# Altium PCB DAC_Board_PCB.PcbDoc
Units mm, origin at the board's own origin, x right, y up, seen from the top; angles counter-clockwise.
Board outline 60 x 24.75 mm, 2 copper layers (Top Layer, Bottom Layer); 38 components, 25 nets, 130 pads, 65 vias.
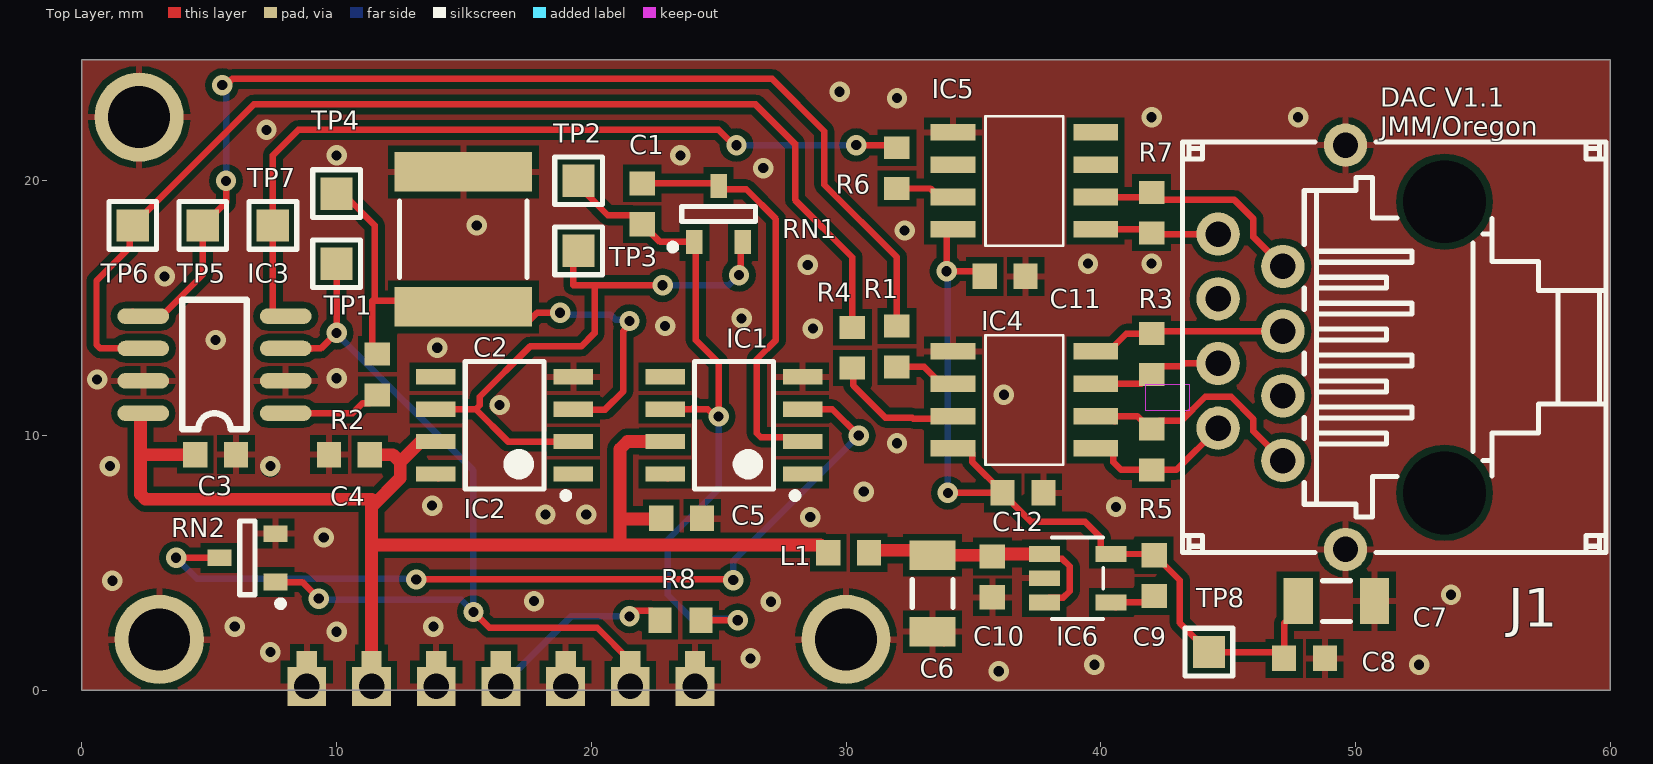
[diagram p0: Top Layer view]
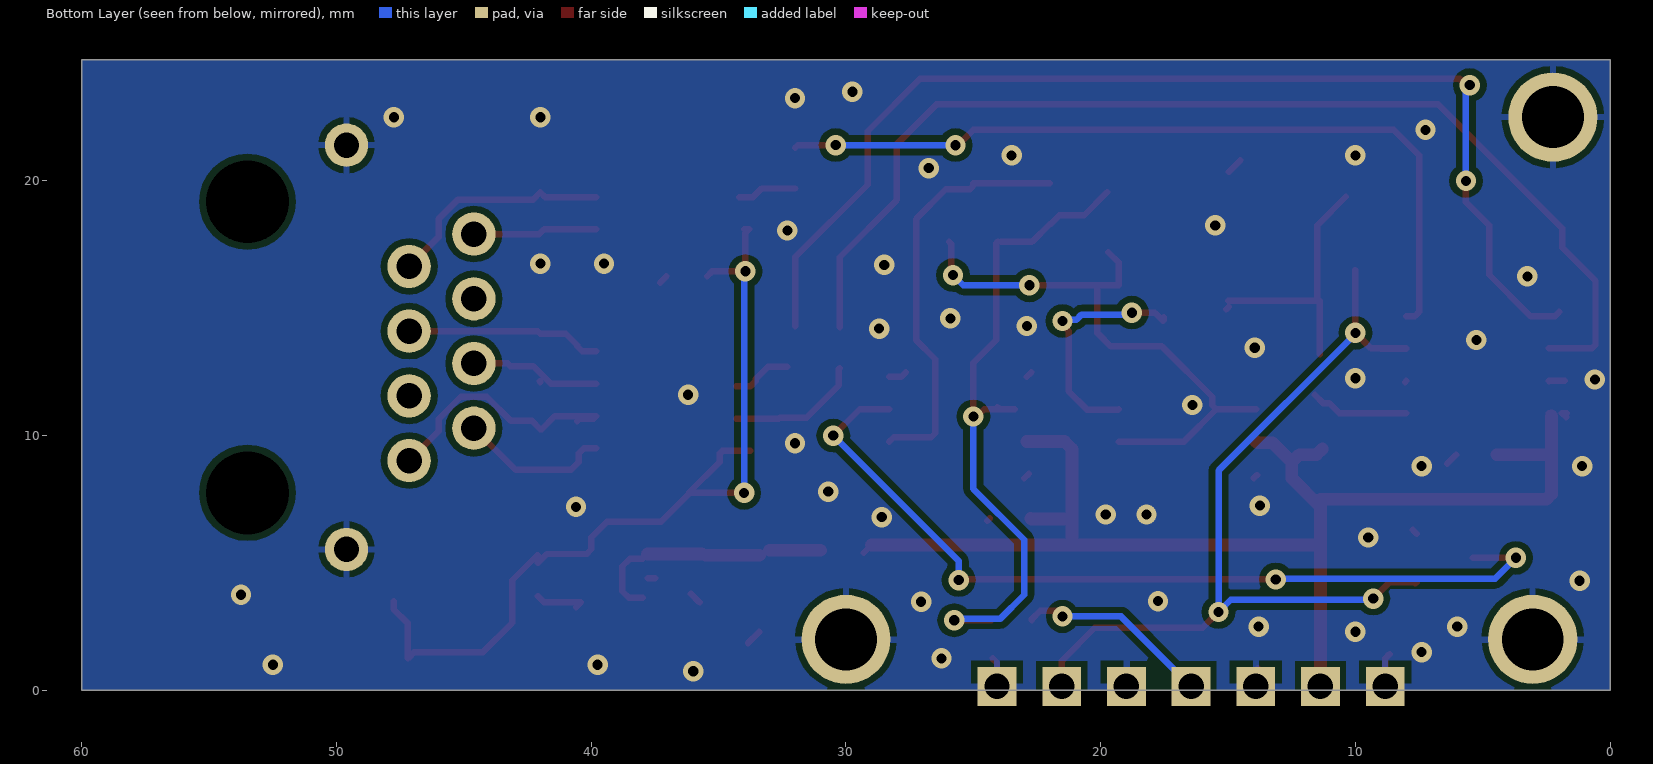
[diagram p1: Bottom Layer view, seen from below]

## Layer stack, top to bottom
Top Solder: solder mask 0.0102, Solder Resist, Dk 3.5
Top Layer: signal copper 0.0356
Dielectric 1: dielectric 0.32, FR-4, Dk 4.8
Bottom Layer: signal copper 0.0356
Bottom Solder: solder mask 0.0102, Solder Resist, Dk 3.5

## Board outline
0,0 60,0 60,24.75 0,24.75

## Design rules (kind name [scope] priority, off if disabled: settings)
Clearance [All] p1: gap=0.254 ignorepadtopadclearanceinfootprint=TRUE except(0: Arc-Hole Track-Hole SMDPad-Hole THPad-Hole Via-Hole Fill-Hole Poly-Hole Region-Hole Text-Hole)
HoleSize [All] p1: absolutevalues=TRUE maxlimit=5 minlimit=0.025 maxpercent=80.000 minpercent=20.000
MinimumSolderMaskSliver [All] p1: minsoldermaskwidth=0.1
PolygonConnect [All] p1: connectstyle=Relief reliefconductorwidth=0.254 reliefentries=4 polygonreliefangle="90 Angle" airgapwidth=0.254
RoutingVias [All] p1: holewidth=0.711 width=1.27 viastyle="Through Hole" minholewidth=0.711 minwidth=1.27 maxholewidth=0.711 maxwidth=1.27
SilkToSilkClearance [All] p1: silktosilkclearance=0.1
SilkToSolderMaskClearance [IsPad] p1: minsilkscreentomaskgap=0.1 clearancetoexposedcopper=TRUE
SolderMaskExpansion [All] p1: expansion=0.102
Width [All] p1: maxlimit=0.6 minlimit=0.254 preferedwidth=0.254 minimp=50.000000 maximp=50.000000 favimp=50.000000
26 further rules are at their usual default settings.

## Components (designator, comment, footprint, x,y, rotation, side; value= is the part's Value field where it differs from the comment)
C1 "8.2pF" CAPC1608X87N 22,19.1 r270 top
C2 "10 uF" CAPC5750X279N 14.975,17.7 r270 top
C3 "100nF" CAPC1608X87N 5.25,9.25 r180 top
C4 "100nF" CAPC1608X87N 10.5,9.25 r0 top
C5 "100nF" CAPC1608X87N 23.55,6.75 r180 top
C6 "10uF" CAPC3216X180N 33.4,3.8 r90 top
C7 "10uF" CAPC3216X180N 49.25,3.5 r180 top
C8 "100nF" CAPC1608X87N 48,1.25 r180 top
C9 "10nF" CAPC1608X87N 42.1,4.5 r90 top
C10 "100nF" CAPC1608X87N 35.75,4.45 r90 top
C11 "100nF" CAPC1608X87N 36.25,16.25 r180 top
C12 "100nF" CAPC1608X87N 36.95,7.75 r180 top
IC1 "LT1677" SOIC127P600X175-8N 25.6,10.4 r180 top
IC2 "LT1677" SOIC127P600X175-8N 16.6,10.4 r180 top
IC3 "AD5541" AD5541 5.1,12.3 r180 top
IC4 "FIN1028MX" FIN1028MX 37,11.4 r0 top
IC5 "FIN1028MX" FIN1028MX 37,20 r0 top
IC6 "LT1761ES5-3.3#TRPBF" LDO 39.1,4.4 r0 top
J1 "RJ45" TYCO_6368150-1 45.88,13.465 r90 top
L1 "120R@100MHz" INDC1608X95N 30.1,5.4 r180 top
R1 "100" RESC1608X55N 32,13.5 r270 top
R2 "0" RESC1608X55N 11.6,12.4 r90 top
R3 "100" RESC1608X55N 42,13.2 r90 top
R4 "100" RESC1608X55N 30.25,13.45 r270 top
R5 "100" RESC1608X55N 42,9.45 r90 top
R6 "100" RESC1608X55N 32,20.5 r270 top
R7 "100" RESC1608X55N 42,18.75 r90 top
R8 "1k" RESC1608X55N 23.5,2.75 r180 top
RN1 "=Value" SOT95P230X112-3N 25,18.7 r90 top
RN2 "=Value" SOT95P230X112-3N 6.5,5.2 r180 top
TP1 "Test Point" TPS127 10,16.75 r0 top
TP2 "Test Point" TPS127 19.5,20 r0 top
TP3 "Test Point" TPS127 19.5,17.25 r0 top
TP4 "Test Point" TPS127 10,19.5 r0 top
TP5 "Test Point" TPS127 4.75,18.25 r0 top
TP6 "Test Point" TPS127 2,18.25 r0 top
TP7 "Test Point" TPS127 7.5,18.25 r0 top
TP8 "Test Point" TPS127 44.25,1.5 r0 top

## Footprints (in the part's own frame and the unit in brackets; to place one, negate y for a bottom-side part, rotate by r counter-clockwise, add the part's x,y. Pads: shape width x height; smd on the part's side, far side on the other; paste and mask are expansions set on the pad)
AD5541 [mil] "AD5541LRZ DAC"
  oval 80x24 smd: 1(-114.17,55.95) 2(-114.17,5.95) 3(-114.17,-44.05) 4(-114.17,-94.05) 5(105.83,-94.05) 6(105.83,-44.05) 7(105.83,5.95) 8(105.83,55.95)
  silkscreen extent -54,-119 46,81, body extent -128,-117 116,80, height 69
CAPC1608X87N [mm] "Chip Capacitor, Body 1.6x0.8mm IPC Medium Density"
  rect 0.95x1 smd: 1(-0.8,0) 2(0.8,0)
  body extent -0.87,-0.47 0.88,0.48, height 0.87
CAPC3216X180N [mm] "Chip Capacitor, Body 3.2x1.6mm, IPC Medium Density"
  rect 1.15x1.8 smd: 1(-1.5,0) 2(1.5,0)
  silkscreen extent -0.55,-0.8 0.55,0.8, body extent -1.7,-0.9 1.7,0.9, height 1.8
CAPC5750X279N [mm] "Chip Capacitor, 2-Leads, Body 5.7x5.0mm, IPC Medium Density"
  rect 1.55x5.4 smd: 1(-2.65,0) 2(2.65,0)
  silkscreen extent -1.5,-2.5 1.5,2.5, body extent -3.05,-2.7 3.05,2.7, height 2.79
FIN1028MX [mm] "LDVS to TTL"
  rect 1.75x0.65 smd: 1(2.8,-1.905) 2(2.8,-0.635) 3(2.8,0.635) 4(2.8,1.905) 5(-2.8,-1.905) 6(-2.8,-0.635) 7(-2.8,0.635) 8(-2.8,1.905)
  silkscreen extent -1.52,-2.54 1.52,2.54
INDC1608X95N [mm] "Chip Inductor, 2-Leads, EIA 0603, Metric 1608, Body 1.6x0.8mm, IPC Medium Density"
  rect 0.95x1 smd: 1(-0.8,0) 2(0.8,0)
  body extent -0.87,-0.47 0.88,0.48, height 0.95
LDO [mm] "3.3 V LDO"
  rect 1.22x0.62 smd: 1(-1.31,0.95) 2(-1.31,0) 3(-1.31,-0.95) 4(1.31,-0.95) 5(1.31,0.95)
  silkscreen extent -1.01,-1.6 1,1.6
RESC1608X55N [mm] "Chip Resistor, EIA 0603, Metric 1608, Body 1.6x0.8mm, IPC Medium Density"
  rect 0.9x1 smd: 1(-0.8,0) 2(0.8,0)
  body extent -0.87,-0.47 0.88,0.48, height 0.55
SOIC127P600X175-8N [mm] "SOIC 8, Pitch 1.27mm - Body 4x5mm, IPC Medium Density"
  rect 1.55x0.6 smd: 1(-2.7,1.905) 2(-2.7,0.635) 3(-2.7,-0.635) 4(-2.7,-1.905) 5(2.7,-1.905) 6(2.7,-0.635) 7(2.7,0.635) 8(2.7,1.905)
  silkscreen extent -2.53,-2.5 1.55,2.88, body extent -3.1,-2.5 3.1,2.5, height 1.75
SOT95P230X112-3N [mm] "SOT23 3-Leads, Pitch 0.95mm - Body 1.3x2.86mm, IPC Medium Density"
  rect 0.95x0.65 smd: 1(-1.1,0.95) 2(-1.1,-0.95) 3(1.1,0)
  silkscreen extent -1.42,-1.45 0.3,1.92, body extent -1.25,-1.5 1.25,1.5, height 1.1
TPS127 [mm] "1.27 x  1.27mm SMD Test Point Area"
  rect 1.27x1.27 smd paste-1.27: 1(0,0)
  silkscreen extent -0.94,-0.94 0.94,0.94
TYCO_6368150-1 [mm] "1 Port RJ45, Straight"
  round 1.7 hole 1: 1(-4.445,-1.27) 2(-3.175,1.27) 3(-1.905,-1.27) 4(-0.635,1.27) 5(0.635,-1.27) 6(1.905,1.27) 7(3.175,-1.27) 8(4.445,1.27) SHIELD(-7.935,-3.73) SHIELD(7.935,-3.73)
  round 0.5 hole 3.25 unplated mask+1.375: M1(5.715,-7.62) M2(-5.715,-7.62)
  silkscreen extent -8.06,-13.96 8.06,2.67, body extent -8.06,-13.96 8.06,2.67, height 16.82

## Part data
C1: library part CC0603_8.2PF_50V_0.5PF_NP0, "Non-polarised capacitor"
C2: library part CAPF2220_10uF_25V_20%
C3 C4 C5 C8 C10 C11 C12: library part CC0603_100NF_50V_10%_X7R, "Non-polarised capacitor"
C6 C7: library part CC1206_10UF_25V_10%_X7R, "Non-polarised capacitor"
C9: library part CC0603_10NF_50V_10%_X7R, "Non-polarised capacitor"
IC1 IC2: "0-5 V Rail to Rail op amp"
IC3: "16 bit serial DAC"
IC4 IC5: "LVDS to TTL"
IC6: "3.3 V LDO"
J1: library part TYCO_6368150-1, "Connector RJ45 + Shield"
L1: library part IND0603_MURATA_BLM18PG121SN1D, "Inductor"
R1 R3 R4 R5 R6 R7: library part R0603_100R_1%_0.1W_100PPM, "Resistor - 1%"
R2: library part R0603_0R_JUMPER, "Resistor"
R8: library part R0603_1K0_0.1%_0.063W_10PPM, "Resistor - 0.1%"
RN1: library part RN_1k_10k_VISHAY_MPMT10011002AT1, "Resistor Network Divider - 0.1%"
RN2: library part RN_1k_20k_VISHAY_MPMT10012002AT1, "Resistor Network Divider - 0.1%"
TP1 TP2 TP3 TP4 TP5 TP6 TP7 TP8: library part SMD_PAD_1.27X1.27MM

## Free pads (board coordinates)
  round 3.5 hole 2.43: 1(2.25,22.5) 1(3.04,2) 1(30,2)
  rect 0.8x1.55 smd: 6(8.832,0.775) 7(11.372,0.775) 8(13.912,0.775) 9(16.452,0.775) 10(18.992,0.775) 11(21.532,0.775) 12(24.072,0.775)
  rect 1.524x1.524 hole 1: 13(8.832,0.15) 13(11.372,0.15) 13(13.912,0.15) 13(16.452,0.15) 13(18.992,0.15) 13(21.532,0.15) 13(24.072,0.15)

## Via types
v1: diameter 0.8, hole 0.4, Top Layer to Bottom Layer, 65 vias

## Nets (pads, with @x,y where several pads share a name; then routed paths per layer and width w, separated by ;. In a path a pad name is that pad's centre, name@x,y a point inside that pad or via, vN(x,y) a via of type N, cw(c..) or ccw(c..) an arc to the next point about the centre after c; other vN are vias at no path point)
GND: C2.1 C3.1 C4.1 C5.1 C6.1 C7.1 C8.1 C10.1 C11.1 C12.1 IC1.4 IC2.4 IC3.2 IC3.7 IC4.8 IC5.8 IC6.2 J1.SHIELD pad.1 pad.6 pad.8 pad.10 pad.12 pad.13@8.832,0.15 pad.13@13.912,0.15 pad.13@18.992,0.15 pad.13@24.072,0.15 RN2.2 | length 6.4
  Top Layer w0.254: IC3.7@1.776,12.149 IC3.7 IC3.7@2.388,12.124 ; C3.1@6.15,9.15 C3.1 6.05,9.247 6.149,9.149 C3.1@6.398,8.899 ; v1@7.4,8.74 v1(7.4,8.8) ; RN2.2 RN2.2@7.746,6.296 ; IC3.2 IC3.2@8.049,12.099 ; pad.6@8.659,1.423 8.832,1.25 pad.6 ; pad.8@13.831,0.856 pad.8 ; C2.1@14.525,20.8 C2.1 ; pad.10 pad.10@18.996,0.779 ; pad.12 24.072,1.077 pad.12@24.245,1.25 ; C5.1 C5.1@24.45,6.65 ; IC1.4@27.652,12.478 27.825,12.305 IC1.4 ; C6.1 C6.1@33.848,1.852 ; C10.1@35.75,3.45 C10.1@36.098,3.798 ; C11.1 C11.1@37.3,16 ; IC6.2@37.49,4.4 IC6.2 ; J1.SHIELD@49.61,21.4 J1.SHIELD@49.68,21.47
  other v1: 36,0.75 39.75,1 52.5,1 26.25,1.25 7.4,1.5 10,2.3 6,2.5 13.8,2.5 27.05,3.475 17.75,3.5 53.75,3.75 1.2,4.3 9.5,6 28.6,6.8 18.2,6.9 19.8,6.9 40.6,7.2 13.75,7.25 30.7,7.8 1.1,8.8 32,9.7 16.4,11.2 36.2,11.6 0.6,12.2 10,12.25 13.95,13.45 5.25,13.75 28.7,14.2 22.9,14.3 25.9,14.6 3.25,16.25 28.5,16.7 39.5,16.75 42,16.75 32.302,18.052 15.5,18.25 26.75,20.5 10,21 23.5,21 7.25,22 42,22.5 47.75,22.5 32,23.25 29.75,23.5
NetC1_1: C1.1 IC1.2 RN1.3 | length 16.5
  Top Layer w0.254: C1.1 25,19.9 RN1.3 25.13,19.67 26.08,19.67 27.25,18.5 27.25,13.75 26.5,13 26.5,10.087 26.649,9.938 28.127,9.938 IC1.2
NetC1_2: C1.2 IC1.6 R8.1 RN1.1 TP2.1 | length 26.5
  Top Layer w0.254: TP2.1@19.75,19.55 20.646,18.654 21.621,18.654 21.975,18.3 C1.2 22.7,17.6 RN1.1@23.896,17.6 ; IC1.6@23.375,11.035 23.971,11.035 ; RN1.1 24.101,17.549 24.101,13.75 25,12.851 v1(25,10.75) 24.852,10.75 24.567,11.035 23.971,11.035 ; 24.056,11.12 23.971,11.035 ; R8.1 v1(25.75,2.75)
  Bottom Layer w0.254: v1(25,10.75) 25,7.905 23,5.905 23,3.75 23.95,2.8 25.7,2.8 v1(25.75,2.75)
NetC9_1: C9.1 IC6.4 | length 2.1
  Top Layer w0.254: IC6.4@40.593,3.267 IC6.4 41.85,3.45 C9.1
NetIC1_3: IC1.3 RN2.3 | length 34.3
  Top Layer w0.254: v1(3.7,5.2) RN2.3 ; v1(13.125,4.35) 25.55,4.35 v1(25.575,4.325) ; IC1.3 29.465,11.035 v1(30.5,10)
  Bottom Layer w0.254: v1(3.7,5.2) 4.519,4.381 13.094,4.381 v1(13.125,4.35) ; v1(25.575,4.325) 25.575,5.075 v1(30.5,10)
NetIC3_1: IC3.1 R2.1 | length 3.9
  Top Layer w0.254: IC3.1 10.629,10.879 11.027,11.277 11.277,11.277 R2.1
NetIC4_1: IC4.1 J1.2 R5.1 | length 6
  Top Layer w0.254: IC4.1 40.297,9.495 40.495,9.297 40.495,8.959 40.804,8.65 42.97,8.65 J1.2
NetIC4_2: IC4.2 J1.1 R5.2 | length 10.1
  Top Layer w0.254: IC4.2 41.435,10.765 41.95,10.25 R5.2 42.323,10.573 43.152,10.573 44.1,11.521 45.12,11.521 45.997,10.644 45.997,10.173 J1.1 ; IC4.2@39.9,10.665 40.45,10.665 IC4.2@40.548,10.567
NetIC4_3: IC4.3 J1.4 R3.1 | length 5.2
  Top Layer w0.254: IC4.3 41.585,12.035 42.273,12.723 43.173,12.723 43.28,12.83 J1.4 ; R3.1@42,12.1 R3.1@42.03,12.13
NetIC4_4: IC4.4 J1.5 R3.2 | length 7.7
  Top Layer w0.254: IC4.4 40.35,13.305 40.548,13.503 40.548,13.548 41,14 R3.2 42.1,14.1 J1.5
NetIC4_6: IC4.6 R4.2 | length 5.3
  Top Layer w0.254: R4.2 30.282,12.618 30.282,11.968 31.55,10.7 32.6,10.7 32.635,10.665 IC4.6@34.3,10.665
NetIC4_7: IC4.7 R1.2 | length 2.4
  Top Layer w0.254: R1.2@32.3,12.7 33.066,12.7 33.552,12.214 33.552,12.133 33.75,11.935 IC4.7@34.3,11.935
NetIC5_1: IC5.1 J1.8 R7.1 | length 4.9
  Top Layer w0.254: IC5.1 41.855,18.095 R7.1 42.04,17.91 J1.8
NetIC5_2: IC5.2 J1.7 R7.2 | length 9
  Top Layer w0.254: IC5.2 41.815,19.365 R7.2 42.3,19.25 45.25,19.25 45.997,18.503 45.997,17.793 J1.7
NetIC5_6: IC5.6 R6.2 | length 2.3
  Top Layer w0.254: R6.2 33.315,19.7 33.65,19.365 IC5.6
P3V3: C7.2 C8.2 C9.2 C11.2 C12.2 IC4.5 IC5.5 IC6.5 TP8.1 | length 35.3
  Top Layer w0.254: IC4.5@33.75,9.395 34.85,9.395 34.948,9.297 34.948,8.977 36.15,7.775 C12.2 ; v1(34,7.75) C12.2 ; IC5.5@34,18.095 33.798,18.095 33.95,17.943 v1(33.95,16.45) 33.957,16.457 35.243,16.457 C11.2 ; C9.2@42.1,5 41.75,5.35 IC6.5 40.183,5.35 40,5.533 40,6 39.387,6.613 37.262,6.613 36.15,7.725 C12.2 ; C9.2 42.125,5.3 43.108,4.318 43.108,2.642 TP8.1 46.95,1.5 C8.2 47.2,2.625 47.75,3.175 C7.2
  Bottom Layer w0.254: v1(33.95,16.45) 34,16.4 v1(34,7.75)
P5V0: C3.2 C4.2 C5.2 IC1.7 IC2.7 IC3.8 L1.2 pad.7 pad.13@11.372,0.15 | length 52.6
  Top Layer w0.254: IC3.8@1.701,10.879 1.89,10.879 IC3.8@1.726,10.715 ; IC3.8@2.3,10.767 IC3.8 ; C3.2@4.35,9.15 C3.2 ; L1.2@29,5.7 L1.2
  Top Layer w0.5: IC3.8@2.3,10.767 2.3,9.25 ; C3.2 2.3,9.25 ; C4.2@11.3,9.475 11.525,9.25 12.207,9.25 12.5,8.957 ; pad.7 11.372,5.7 ; IC2.7 13.85,9.715 13.258,9.715 12.5,8.957 ; C5.2 22.725,6.725 21.125,6.725 ; IC1.7 21.418,9.765 21.125,9.472 21.125,6.725 ; L1.2@29,5.7 21.25,5.7 ; 2.3,9.25 2.3,7.7 2.5,7.5 11.372,7.5 11.372,7.2 ; 11.372,5.7 11.372,7.2 ; 11.372,5.7 21.25,5.7 ; 11.372,7.2 12.5,8.328 12.5,8.957 ; 21.125,6.725 21.125,5.825 21.25,5.7
REF_3V3: IC3.3 pad.11 pad.13@21.532,0.15 RN2.1 TP1.1 | length 34.6
  Top Layer w0.254: RN2.1@7.65,4.2 RN2.1 8.65,4.25 v1(9.3,3.6) ; IC3.3@9,13.411 8.007,13.411 IC3.3 9.388,13.419 v1(10,14.031) TP1.1@10,16.5 ; v1(15.375,3.075) 16,2.45 20.232,2.45 21.532,1.15 pad.11
  Bottom Layer w0.254: v1(9.3,3.6) 9.35,3.55 14.9,3.55 v1(15.375,3.075) 15.375,8.625 10,14 v1(10,14.031)
SPI_CS: IC3.4 R6.1 TP7.1 | length 31.9
  Top Layer w0.254: IC3.4 7.664,14.689 7.5,14.853 TP7.1 7.5,21 8.5,22 25,22 25.6,21.4 v1(25.7,21.4) ; v1(30.402,21.402) 31.898,21.402 R6.1
  Bottom Layer w0.254: v1(25.7,21.4) v1@30.407,21.4
SPI_MOSI: IC3.6 R4.1 TP6.1 | length 43.9
  Top Layer w0.254: IC3.6 0.724,13.419 0.575,13.568 0.575,16.075 1.883,17.383 1.883,18.133 6.75,23 26.45,23 28,21.45 28,19.25 30.25,17 R4.1
SPI_SCLK: IC3.5 R1.1 TP5.1 | length 44.8
  Top Layer w0.254: IC3.5@2,14.853 2.164,14.689 IC3.5 3.123,14.689 4.75,16.316 TP5.1 5.66,19.16 v1(5.66,20) ; v1(5.508,23.758) 5.656,23.758 5.898,24 27.1,24 29.15,21.95 29.15,19.85 32,17 R1.1
  Bottom Layer w0.254: v1(5.508,23.758) 5.66,23.606 v1(5.66,20)
v_DAC: C2.2 IC2.3 R2.2 TP4.1 | length 19.9
  Top Layer w0.254: TP4.1@10.375,19.375 11.5,18.25 11.5,15.3 ; R2.2@11.4,13.2 11.4,15.3 C2.2@15,15.3 ; C2.2 C2.2@15.075,14.95 ; C2.2@17.525,14.65 17.525,14.523 17.548,14.5 17.611,14.564 17.873,14.825 v1(18.775,14.825) ; IC2.3 19.315,11.02 20.539,11.02 21.25,11.73 21.25,14.102 21.5,14.352 v1(21.5,14.5)
  Bottom Layer w0.254: v1@18.75,14.75 20.75,14.75 20.952,14.548 21.452,14.548 v1(21.5,14.5)
V_offset: IC2.2 IC2.6 RN1.2 TP3.1 | length 23.4
  Top Layer w0.254: IC2.6 15.46,11.035 ; IC2.2 16.73,9.765 15.46,11.035 ; TP3.1@19.7,17.2 19.3,16.8 19.3,15.9 20.129,15.9 ; v1(22.8,15.9) 20.129,15.9 ; v1(25.8,16.3) 25.875,16.375 25.875,17.525 RN1.2 ; 15.46,11.035 15.619,11.193 15.619,11.523 17.595,13.5 19.605,13.5 20.129,14.024 20.129,15.9
  Bottom Layer w0.254: v1(22.8,15.9) 25.4,15.9 v1(25.8,16.3)
V_Tune: pad.9 pad.13@16.452,0.15 R8.2 | length 7.7
  Top Layer w0.254: v1(21.5,2.9) 21.723,3.123 22.377,3.123 22.7,2.8 R8.2
  Bottom Layer w0.254: pad.13@16.452,0.15 19.202,2.9 v1(21.5,2.9)
Vin: C6.2 C10.2 IC6.1 IC6.3 L1.1 | length 9.1
  Top Layer w0.254: IC6.3@37.973,3.633 38.523,3.633 38.781,3.891 38.781,4.868 38.482,5.167 IC6.1@37.973,5.167
  Top Layer w0.5: L1.1@31,5.5 C6.2@33,5.5 ; C6.2 C10.2@35.5,5.3 ; C10.2@35.65,5.35 IC6.1
pads on no net: IC1.1 IC1.5 IC1.8 IC2.1 IC2.5 IC2.8 IC5.3 IC5.4 IC5.7 J1.3 J1.6 J1.M1 J1.M2
copper on no net: | length 0.7
  Top Layer w0.254: 13.855,8.45 13.872,8.45 14,8.322 ; 22.727,12.478 22.9,12.305 ; 22.824,8.495 22.827,8.495 23,8.322

## Polygon pours and split planes (outlines as drawn)
GND on Top Layer (solid, pour order 151): 0,0 0,24.75 60,24.75 60,0
GND on Top Layer "GND_L01_P109" (solid, remove dead copper, pour order 109): 3,0
GND on Top Layer "Top Layer-GND 1" (solid, pour order 50): 0,23.5
GND on Bottom Layer (solid, pour order 153): 0,0 0,24.75 60,24.75 60,0

## Keep-outs
Top Layer:
  rectangle: 41.75,11 43.5,12

## Other copper
Top Layer:
  pour cut-out: 42,10

## Silkscreen, mask and mechanical layers (free items; w line width, h text height)
Top Overlay:
  text "DAC V1.1 / JMM/Oregon" at 50.975,21.775 h0.75
Board Outline:
  the board outline again, w0.1